# EAGLE board stencil (EAGLE 9.6.2), part 1 of 3
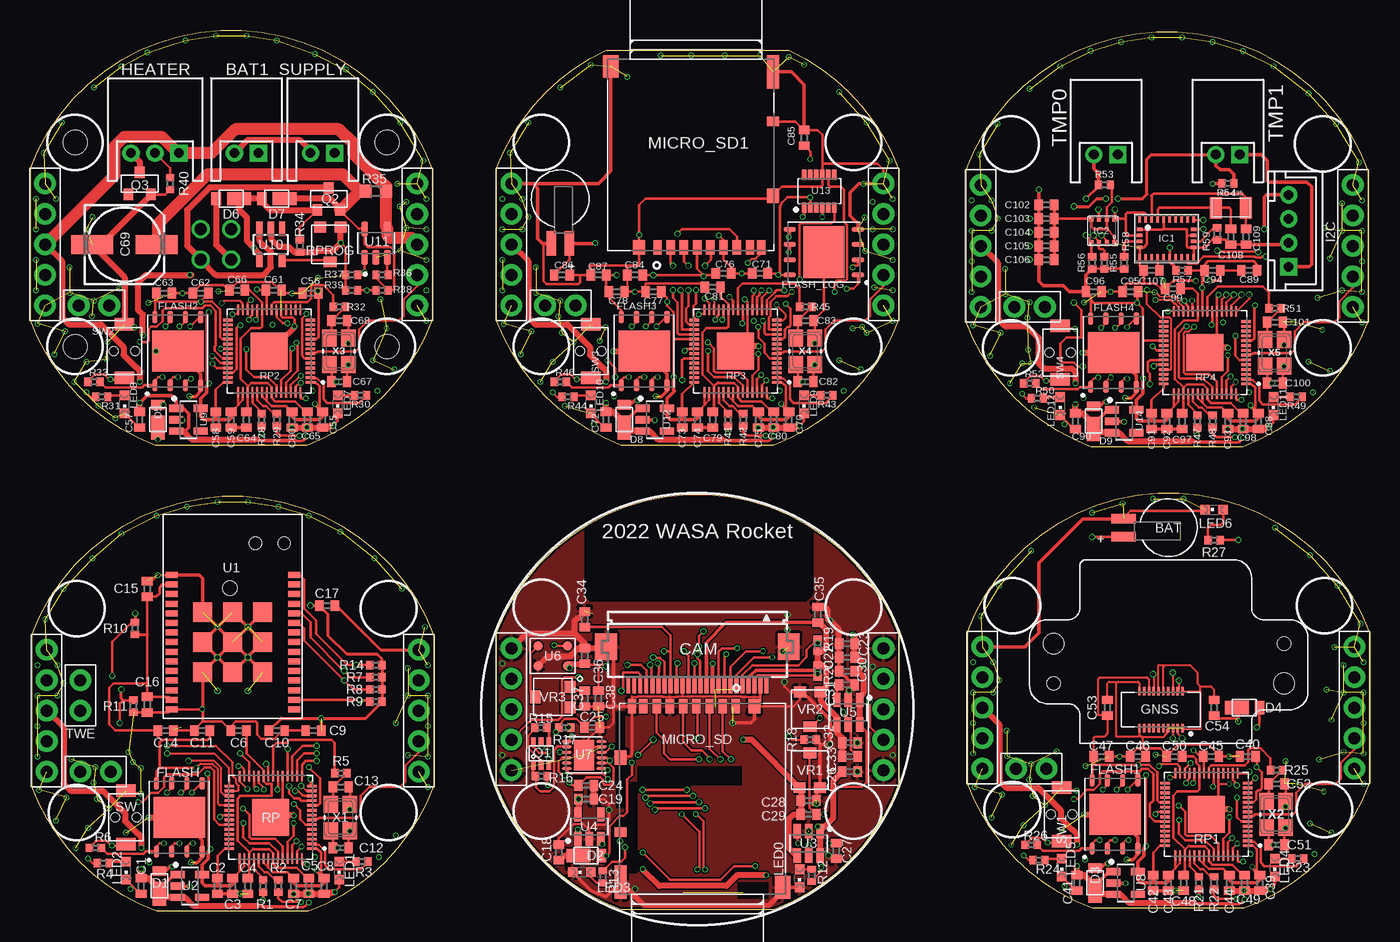
[diagram p0: board, top side]
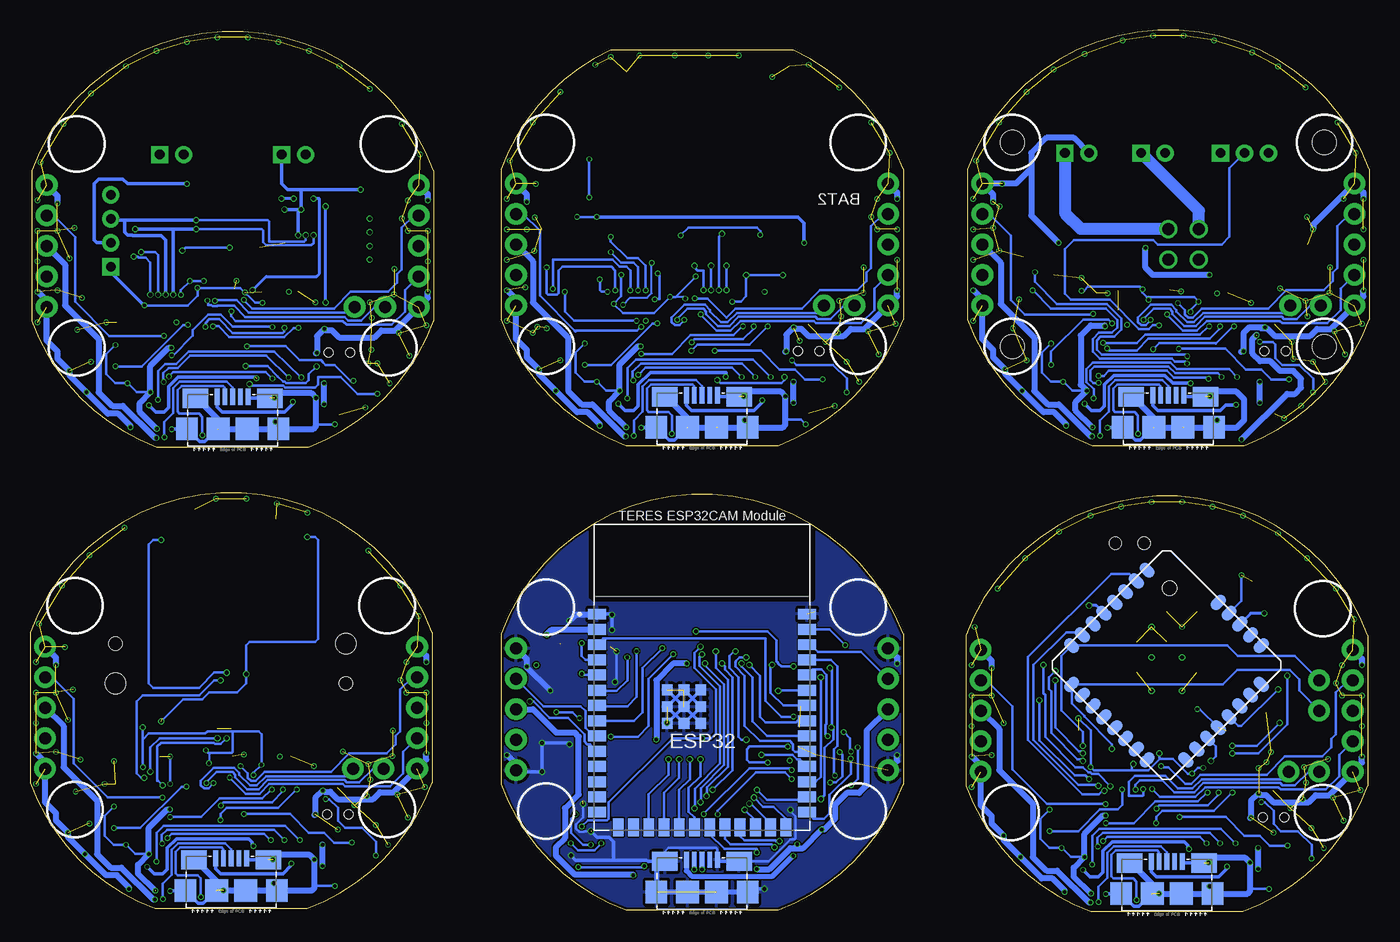
[diagram p1: board, bottom side, seen from below]

Size 111.63 x 73.48 mm. Coordinates in mm from the lower left corner, seen from the top.
Outline: 33.66,23.01 33.66,10.46 arc-49 23.24,0 10.54,0 arc-49 0.13,10.46 0.13,23.01 arc-139 33.66,23.01
Outline: 72.39,23.14 72.39,10.59 arc-49 61.98,0.13 49.28,0.13 arc-49 38.86,10.59 38.86,23.14 arc-139 72.39,23.14
Outline: 111.63,23.26 111.63,10.71 arc-49 101.22,0.25 88.52,0.25 arc-49 78.11,10.71 78.11,23.26 arc-139 111.63,23.26
Outline: 33.53,61.87 33.53,49.32 arc-49 23.11,38.86 10.41,38.86 arc-49 0,49.32 0,61.87 arc-139 33.53,61.87
Outline: 72.39,61.87 72.39,49.32 arc-49 61.98,38.86 49.28,38.86 arc-49 38.86,49.32 38.86,61.87 arc-44 48.01,71.79 63.25,71.79 arc-44 72.39,61.87
Outline: 111.51,61.75 111.51,49.2 arc-49 101.09,38.73 88.39,38.73 arc-49 77.98,49.2 77.98,61.75 arc-139 111.51,61.75
Copper layers (1*16): Top 0.035mm / dielectric 1mm / Bottom 0.035mm
Design rules "jlcpcb-2layers-1.0mm": minimum track width 5mil, minimum drill 0.3mm, track to track 5mil, track to pad 5mil, pad to pad 5mil, via to via 5mil, smd to smd 5mil, copper to edge 0.2mm, drill to drill 6mil, minimum pad ring 10mil, minimum via ring 3mil, stop-mask expansion 4mil, vias tented up to drill 1mm, thermal gap 10mil
Holes 2 mm at 29.76,64.1 29.76,47.1 3.76,64.1 3.76,47.1

## Footprints (pad centres in the part's own frame; a part is rotated, then mirrored left to right if it is on the bottom)
BAT_MS414GE-FL26E = smd 2.05 x 0.8: + 3.725,0.75; - 3.725,-0.75
S2B-PH-K-S = drill 0.8 square: 1 1,0 | drill 0.8: 2 -1,0
P5_2.54 = drill 1: 1 0,5.08; 2 0,2.54; 3 0,0; 4 0,-2.54; 5 0,-5.08
C0402 = smd 0.7 x 0.9: 1 -0.65,0; 2 0.65,0
153CLV-0605 = smd 3.5 x 1.6: + 2.7,0; - -2.7,0
FH12-24S-0.5SH = smd 0.3 x 1.3: 1 -5.75,3.25; 2 -5.25,3.25; 3 -4.75,3.25; 4 -4.25,3.25; 5 -3.75,3.25; 6 -3.25,3.25; 7 -2.75,3.25; 8 -2.25,3.25; 9 -1.75,3.25; 10 -1.25,3.25; 11 -0.75,3.25; 12 -0.25,3.25; 13 0.25,3.25; 14 0.75,3.25; 15 1.25,3.25; 16 1.75,3.25; 17 2.25,3.25; 18 2.75,3.25; 19 3.25,3.25; 20 3.75,3.25; 21 4.25,3.25; 22 4.75,3.25; 23 5.25,3.25; 24 5.75,3.25 | smd 1.8 x 2.2: PAD1 -7.62,0; PAD2 7.62,0
CUHS20S30 = smd 0.8 x 1.1: A 1.25,0 | smd 2 x 1.1: C -0.65,0
XCVR_ESP32-S3-WROOM-1-N16R2 = smd 1.5 x 0.9: 1 -8.75,5.26; 2 -8.75,3.99; 3 -8.75,2.72; 4 -8.75,1.45; 5 -8.75,0.18; 6 -8.75,-1.09; 7 -8.75,-2.36; 8 -8.75,-3.63; 9 -8.75,-4.9; 10 -8.75,-6.17; 11 -8.75,-7.44; 12 -8.75,-8.71; 13 -8.75,-9.98; 14 -8.75,-11.25; 27 8.75,-11.25; 28 8.75,-9.98; 29 8.75,-8.71; 30 8.75,-7.44; 31 8.75,-6.17; 32 8.75,-4.9; 33 8.75,-3.63; 34 8.75,-2.36; 35 8.75,-1.09; 36 8.75,0.18; 37 8.75,1.45; 38 8.75,2.72; 39 8.75,3.99; 40 8.75,5.26 | smd 0.9 x 1.5: 15 -6.985,-12.5; 16 -5.715,-12.5; 17 -4.445,-12.5; 18 -3.175,-12.5; 19 -1.905,-12.5; 20 -0.635,-12.5; 21 0.635,-12.5; 22 1.905,-12.5; 23 3.175,-12.5; 24 4.445,-12.5; 25 5.715,-12.5; 26 6.985,-12.5 | smd 0.9 x 0.9: 41_1 -1.5,-2.46; 41_2 -2.9,-2.46; 41_3 -0.1,-2.46; 41_4 -2.9,-3.86; 41_5 -1.5,-3.86; 41_6 -0.1,-3.86; 41_7 -2.9,-1.06; 41_8 -1.5,-1.06; 41_9 -0.1,-1.06
FC-135 = smd 1 x 1.8: P$1 0,0; P$2 2.5,0
SON127P600X500X80-9N = smd 1.04 x 0.44: 1 -2.845,1.905; 2 -2.845,0.635; 3 -2.845,-0.635; 4 -2.845,-1.905; 5 2.845,-1.905; 6 2.845,-0.635; 7 2.845,0.635; 8 2.845,1.905 | smd 3.4 x 4.3: 9 0,0
GYSFDMAXB = smd 0.2 x 0.7: 1 -0.55,6.54; 2 -0.55,3.46; 3 -0.15,6.54; 4 -0.15,3.46; 5 0.25,6.54; 6 0.25,3.46; 7 0.65,6.54; 8 0.65,3.46; 9 1.05,6.54; 10 1.05,3.46; 11 1.45,6.54; 12 1.45,3.46; 13 1.85,6.54; 14 1.85,3.46; 15 2.25,6.54; 16 2.25,3.46; 17 2.65,6.54; 18 2.65,3.46; 19 3.05,6.54; 20 3.05,3.46 | hole 1.1: 10.2,2.8; -9,-0.5 | hole 1.7: 10.2,-0.5; -9,2.8
S3B-PH-K-S = drill 0.8 square: 1 2,0 | drill 0.8: 2 0,0; 3 -2,0
B4B-PH-K-S = drill 0.8 square: 1 -3,0 | drill 0.8: 2 -1,0; 3 1,0; 4 3,0
LGA-28_3.80X5.20/0.5 = smd 0.3 x 0.5: 1 -2.25,1.56; 6 -2.25,-1.56; 7 -1.75,-1.56; 8 -1.25,-1.56; 9 -0.75,-1.56; 10 -0.25,-1.56; 11 0.25,-1.56; 12 0.75,-1.56; 13 1.25,-1.56; 14 1.75,-1.56; 15 2.25,-1.56; 20 2.25,1.56; 21 1.75,1.56; 22 1.25,1.56; 23 0.75,1.56; 24 0.25,1.56; 25 -0.25,1.56; 26 -0.75,1.56; 27 -1.25,1.56; 28 -1.75,1.56 | smd 0.5 x 0.3: 2 -2.25,0.75; 3 -2.25,0.25; 4 -2.25,-0.25; 5 -2.25,-0.75; 16 2.25,-0.75; 17 2.25,-0.25; 18 2.25,0.25; 19 2.25,0.75
BME280 = smd 0.35 x 0.5: 1 0.975,-1.025; 2 0.325,-1.025; 3 -0.325,-1.025; 4 -0.975,-1.025; 5 -0.975,1.025; 6 -0.325,1.025; 7 0.325,1.025; 8 0.975,1.025
GHI-CONNECTORS_10118192-0001LF(MICRO-USB-B-AMPHENOL-FCI) = smd 1.8 x 1.9: CGND1 -3.8,0; CGND4 3.8,0 | smd 1.9 x 1.9: CGND2 -1.2,0; CGND3 1.2,0 | smd 2.1 x 1.6: CGND5 3.1,2.55; CGND6 -3.1,2.55 | smd 0.4 x 1.35: D+ 0,2.675; D- -0.65,2.675; GND 1.3,2.675; ID 0.65,2.675; VBUS -1.3,2.675
CHIPLED_0603 = smd 0.8 x 0.8: A 0,-0.75; C 0,0.75
HRS_DM3AT-SF-PEJM5 = smd 0.7 x 1.2: 1 3.2,0; 2 2.1,0; 3 1,0; 4 -0.1,0; 5 -1.2,0; 6 -2.3,0; 7 -3.4,0; 8 -4.5,0; SWB -5.45,0 | smd 1 x 1.2: P1 -6.4,-4.3; P4 4.75,0 | smd 1 x 2.8: P2 -6.4,-14.65 | smd 1.3 x 1.9: P3 7.1,-15.1 | smd 1 x 0.8: SWA -6.4,-10.5
SOT-363 = smd 0.4 x 0.8: 1 -0.65,-0.95; 2 0,-0.95; 3 0.65,-0.95; 4 0.65,0.95; 5 0,0.95; 6 -0.65,0.95
SOT-23 = smd 0.802 x 0.972: P1 -0.95,-0.917; P2 0.95,-0.917; P3 0,0.917
R0402 = smd 0.6 x 0.7: 1 -0.5,0; 2 0.5,0
R0603 = smd 1 x 1.1: 1 -0.85,0; 2 0.85,0
QFN40P700X700X90-57N = smd 0.84 x 0.2: 1 -3.435,2.6; 2 -3.435,2.2; 3 -3.435,1.8; 4 -3.435,1.4; 5 -3.435,1; 6 -3.435,0.6; 7 -3.435,0.2; 8 -3.435,-0.2; 9 -3.435,-0.6; 10 -3.435,-1; 11 -3.435,-1.4; 12 -3.435,-1.8; 13 -3.435,-2.2; 14 -3.435,-2.6; 29 3.435,-2.6; 30 3.435,-2.2; 31 3.435,-1.8; 32 3.435,-1.4; 33 3.435,-1; 34 3.435,-0.6; 35 3.435,-0.2; 36 3.435,0.2; 37 3.435,0.6; 38 3.435,1; 39 3.435,1.4; 40 3.435,1.8; 41 3.435,2.2; 42 3.435,2.6 | smd 0.2 x 0.84: 15 -2.6,-3.435; 16 -2.2,-3.435; 17 -1.8,-3.435; 18 -1.4,-3.435; 19 -1,-3.435; 20 -0.6,-3.435; 21 -0.2,-3.435; 22 0.2,-3.435; 23 0.6,-3.435; 24 1,-3.435; 25 1.4,-3.435; 26 1.8,-3.435; 27 2.2,-3.435; 28 2.6,-3.435; 43 2.6,3.435; 44 2.2,3.435; 45 1.8,3.435; 46 1.4,3.435; 47 1,3.435; 48 0.6,3.435; 49 0.2,3.435; 50 -0.2,3.435; 51 -0.6,3.435; 52 -1,3.435; 53 -1.4,3.435; 54 -1.8,3.435; 55 -2.2,3.435; 56 -2.6,3.435 | smd 3.1 x 3.1: 57 0,0
PVZ3A = smd 1 x 0.9: 1 -0.85,-1.45; 3 0.85,-1.45 | smd 1.1 x 0.9: 2 0,1.45
TVAF06-A020B-R = smd 1.6 x 1.05: P$1 0,2.225; P$2 0,-2.225 | hole 0.75: -0.9,0; 0.9,0
P2_2.54 = drill 1: P$1 0,1.27; P$2 0,-1.27
ES920LR3 = smd 1 x 0.5: P1 -5.08,5.6; P2 -5.08,4.8; P3 -5.08,4; P4 -5.08,3.2; P5 -5.08,2.4; P6 -5.08,1.6; P7 -5.08,0.8; P8 -5.08,0; P9 -5.08,-0.8; P10 -5.08,-1.6; P11 -5.08,-2.4; P12 -5.08,-3.2; P13 -5.08,-4; P14 -5.08,-4.8; P15 -5.08,-5.6; P16 5.12,-5.6; P17 5.12,-4.8; P18 5.12,-4; P19 5.12,-3.2; P20 5.12,-2.4; P21 5.12,-1.6; P22 5.12,-0.8; P23 5.12,0; P24 5.12,0.8; P25 5.12,1.6; P26 5.12,2.4; P27 5.12,3.2; P28 5.12,4; P29 5.12,4.8; P30 5.12,5.6 | smd 1.6 x 1.6: P31 -2.5,2.5; P32 -2.5,0; P33 -2.5,-2.5; P34 0,2.5; P35 0,0; P36 0,-2.5; P37 2.5,2.5; P38 2.5,0; P39 2.5,-2.5 | hole 1: 1.9,8.25; 4.3,8.25
SOT95P240X110-5N = smd 1.18 x 0.609: 1 -1.024,0.95; 2 -1.024,0; 3 -1.024,-0.95; 4 1.024,-0.95; 5 1.024,0.95
SOT95P240X110-6N = smd 1.18 x 0.609: 1 -1.024,0.95; 2 -1.024,0; 3 -1.024,-0.95; 4 1.024,-0.95; 5 1.024,0; 6 1.024,0.95
SPU0414HR5H-SB = smd 0.8 x 0.8: 1 0.85,1.23; 2 0.85,-1.23; 3 -0.85,-1.23; 4 -0.85,1.23
SON45P300X300X80-13N = smd 0.85 x 0.25: 1 -1.45,1.125; 2 -1.45,0.675; 3 -1.45,0.225; 4 -1.45,-0.225; 5 -1.45,-0.675; 6 -1.45,-1.125; 7 1.45,-1.125; 8 1.45,-0.675; 9 1.45,-0.225; 10 1.45,0.225; 11 1.45,0.675; 12 1.45,1.125 | smd 1.65 x 2.55: 13 0,0
SOT23-5L = smd 0.533 x 1.2: 1 -0.95,-1.3; 2 0,-1.3; 3 0.95,-1.3 | smd 0.55 x 1.2: 4 0.95,1.3; 5 -0.95,1.3
SOT95P280X100-5N_LT6106CS5#PBF = smd 1.24 x 0.55: 1 -1.185,0.95; 2 -1.185,0; 3 -1.185,-0.95; 4 1.185,-0.95; 5 1.185,0.95
VSOJ12 = smd 0.862 x 0.372: 1 -1.375,1.25; 2 -1.375,0.75; 3 -1.375,0.25; 4 -1.375,-0.25; 5 -1.375,-0.75; 6 -1.375,-1.25; 7 1.375,-1.25; 8 1.375,-0.75; 9 1.375,-0.25; 10 1.375,0.25; 11 1.375,0.75; 12 1.375,1.25
LITE = smd 1.4 x 0.9: 1 0.25,11.43; 2 0.25,10.16; 3 0.25,8.89; 4 0.25,7.62; 5 0.25,6.35; 6 0.25,5.08; 7 0.25,3.81; 8 0.25,2.54; 17 13.72,2.54; 18 13.72,3.81; 19 13.72,5.08; 20 13.72,6.35; 21 13.72,7.62; 22 13.72,8.89; 23 13.72,10.16; 24 13.72,11.43 | smd 0.9 x 1.4: 9 2.54,0.25; 10 3.81,0.25; 11 5.08,0.25; 12 6.35,0.25; 13 7.62,0.25; 14 8.89,0.25; 15 10.16,0.25; 16 11.43,0.25; 25 11.43,13.72; 26 10.16,13.72; 27 8.89,13.72; 28 7.62,13.72; 29 6.35,13.72 | hole 1.2: 2.65,11.7
FA-238 = smd 1.4 x 1.2: 1 -1.1,-0.8; 2 1.1,-0.8; 3 1.1,0.8; 4 -1.1,0.8

## Placement (x,y rotation side)
BAT  MS414GE-FL26E  [BAT_MS414GE-FL26E]  94.87,31.98 180 top
BAT1  [S2B-PH-K-S]  18.03,63.22 0 top
BAT2  MS414GE-FL26E  [BAT_MS414GE-FL26E]  44.2,59.41 270 top
BOTTOM  P5_2.54  [P5_2.54]  32.39,16.74 0 top
BOTTOM1  P5_2.54  [P5_2.54]  110.37,16.99 0 top
BOTTOM2  P5_2.54  [P5_2.54]  32.26,55.6 0 top
BOTTOM3  P5_2.54  [P5_2.54]  71.13,55.6 0 top
BOTTOM4  P5_2.54  [P5_2.54]  110.24,55.47 0 top
C1  0.1µF  [C0402]  9.27,2.13 270 top
C2  10µF  [C0402]  15.62,2.13 270 top
C3  1µ  [C0402]  16.89,2.13 270 top
C4  1µ  [C0402]  18.16,2.13 270 top
C5  1μ  [C0402]  23.24,2.13 270 top
C6  1μ  [C0402]  17.4,15.08 180 top
C7  0.1µ  [C0402]  21.97,2.13 270 top
C8  0.1µ  [C0402]  24.51,2.13 270 top
C9  0.1µ  [C0402]  23.62,15.08 180 top
C10  0.1µ  [C0402]  20.57,15.08 0 top
C11  0.1µ  [C0402]  14.35,15.08 180 top
C12  0.1μ  [C0402]  25.91,5.31 180 top
C13  0.1μ  [C0402]  25.91,10.39 0 top
C14  0.1μ  [C0402]  11.3,15.08 0 top
C15  0.1µ  [C0402]  9.78,26.9 90 top
C16  0.1µ  [C0402]  9.78,17.24 90 top
C17  0.1µ  [C0402]  24.77,25.5 0 top
C18  0.1µF  [C0402]  44.07,4.92 90 top
C19  10µF  [C0402]  46.36,9.37 0 top
C20  P5_2.54  [P5_2.54]  40.13,16.86 0 top
C21  P5_2.54  [P5_2.54]  71.13,16.86 0 top
C22  22µF  [C0402]  68.07,21.18 180 top
C23  0.1µF  [C0402]  68.07,22.32 180 top
C24  0.1µF  [C0402]  46.36,10.51 0 top
C25  0.1µF  [C0402]  46.84,15.35 0 top
C26  0.1µF  [C0402]  68.33,11.66 0 top
C27  0.01µF  [C0402]  67.18,5.05 270 top
C28  2.2µF  [C0402]  64.89,9.24 0 top
C29  100pF  [C0402]  64.9,8.1 0 top
C30  0.1µF  [C0402]  68.07,20.04 180 top
C31  0.01µF  [C0402]  68.07,18.89 0 top
C32  1.0µF  [C0402]  68.33,14.07 0 top
C33  100pF  [C0402]  68.33,12.93 0 top
C34  15pF  [C0402]  46.23,24.36 90 top
C35  0.1µF  [C0402]  65.66,24.74 90 top
C36  0.1µF  [C0402]  46.23,21.31 90 top
C37  2.2µF  [C0402]  46.23,17.75 270 top
C38  10µF  [C0402]  47.37,17.75 270 top
C39  0.1µ  [C0402]  102.49,2.38 270 top
C40  0.1µ  [C0402]  101.47,12.93 180 top
C41  0.1µF  [C0402]  87.25,2.38 270 top
C42  10µF  [C0402]  93.6,2.38 270 top
C43  1µ  [C0402]  94.87,2.38 270 top
C44  0.1µ  [C0402]  99.95,2.38 270 top
C45  0.1µ  [C0402]  98.42,12.93 0 top
C46  0.1µ  [C0402]  92.33,12.93 180 top
C47  [C0402]  89.28,12.93 0 top
C48  1µ  [C0402]  96.14,2.38 270 top
C49  [C0402]  101.22,2.38 270 top
C50  [C0402]  95.38,12.93 180 top
C51  [C0402]  103.89,5.56 180 top
C52  [C0402]  103.89,10.64 0 top
C53  0.1µ  [C0402]  89.79,16.99 90 top
C54  0.1µ  [C0402]  98.68,16.99 90 top
C55  0.1µ  [C0402]  24.38,40.99 270 top
C56  0.1µ  [C0402]  23.37,51.53 180 top
C57  0.1µF  [C0402]  9.14,40.99 270 top
C58  10µF  [C0402]  15.49,40.99 270 top
C59  1µ  [C0402]  16.76,40.99 270 top
C60  0.1µ  [C0402]  21.84,40.99 270 top
C61  0.1µ  [C0402]  20.32,51.79 0 top
C62  0.1µ  [C0402]  14.22,51.53 180 top
C63  10µF  [C0402]  11.18,51.53 0 top
C64  1µ  [C0402]  18.03,40.99 270 top
C65  0.1µ  [C0402]  23.11,40.99 270 top
C66  0.1µ  [C0402]  17.27,51.79 180 top
C67  10p  [C0402]  25.78,44.17 180 top
C68  10p  [C0402]  25.78,49.25 0 top
C69  [153CLV-0605]  7.87,55.6 0 top
C70  0.1µ  [C0402]  63.25,40.99 270 top
C71  0.1µ  [C0402]  60.83,53.18 180 top
C72  0.1µF  [C0402]  48.01,40.99 270 top
C73  10µF  [C0402]  54.36,40.99 270 top
C74  1µ  [C0402]  55.63,40.99 270 top
C75  0.1µ  [C0402]  60.71,40.99 270 top
C76  0.1µ  [C0402]  57.78,53.18 0 top
C77  0.1µ  [C0402]  51.94,51.66 180 top
C78  [C0402]  48.89,51.66 0 top
C79  1µ  [C0402]  56.9,40.99 270 top
C80  [C0402]  61.98,40.99 270 top
C81  [C0402]  56.9,52.04 180 top
C82  [C0402]  64.64,44.17 180 top
C83  [C0402]  64.64,49.25 0 top
C84  10µF  [C0402]  50.42,53.06 180 top
C85  [C0402]  64.52,64.49 90 top
C86  0.1µF  [C0402]  44.32,53.06 0 top
C87  0.1µF  [C0402]  47.37,53.06 180 top
C88  0.1µ  [C0402]  102.36,40.87 270 top
C89  0.1µ  [C0402]  101.6,53.44 180 top
C90  0.1µF  [C0402]  87.12,40.87 270 top
C91  10µF  [C0402]  93.47,40.87 270 top
C92  1µ  [C0402]  94.74,40.87 270 top
C93  0.1µ  [C0402]  99.82,40.87 270 top
C94  0.1µ  [C0402]  98.55,53.44 0 top
C95  0.1µ  [C0402]  91.69,51.66 180 top
C96  [C0402]  88.65,51.66 0 top
C97  1µ  [C0402]  96.01,40.87 270 top
C98  [C0402]  101.09,40.87 270 top
C99  [C0402]  95.25,51.91 180 top
C100  [C0402]  103.76,44.04 180 top
C101  [C0402]  103.76,49.12 0 top
C102  0.1µ  [C0402]  84.71,58.9 0 top
C103  0.1µ  [C0402]  84.71,57.76 0 top
C104  0.1µ  [C0402]  84.71,56.61 0 top
C105  6.8n  [C0402]  84.71,55.47 0 top
C106  0.12u  [C0402]  84.71,54.33 0 top
C107  0.1µ  [C0402]  93.47,53.44 180 top
C108  [C0402]  100.08,56.23 90 top
C109  [C0402]  101.35,56.23 90 top
CAM  OV2640_FPC_INV  [FH12-24S-0.5SH]  55.63,22.07 180 top
D1  CUHS20S30  [CUHS20S30]  10.79,2.13 90 top
D2  CUHS20S30  [CUHS20S30]  46.36,4.67 0 top
D3  CUHS20S30  [CUHS20S30]  88.77,2.38 90 top
D4  CUHS20S30  [CUHS20S30]  101.22,16.99 0 top
D5  CUHS20S30  [CUHS20S30]  10.67,40.99 90 top
D6  CUHS20S30  [CUHS20S30]  16.76,59.41 180 top
D7  CUHS20S30  [CUHS20S30]  20.57,59.41 180 top
D8  CUHS20S30  [CUHS20S30]  49.53,40.99 90 top
D9  CUHS20S30  [CUHS20S30]  88.65,40.87 90 top
ESP32  ESP32-S3-WROOM-1-N16R2  [XCVR_ESP32-S3-WROOM-1-N16R2]  55.63,19.53 0 bottom
FC-135  FC-135  [FC-135]  98.84,58.65 0 top
FLASH  W25Q32JVZPIQ  [SON127P600X500X80-9N]  12.45,7.85 90 top
FLASH1  W25Q32JVZPIQ  [SON127P600X500X80-9N]  90.42,8.1 90 top
FLASH2  W25Q32JVZPIQ  [SON127P600X500X80-9N]  12.32,46.71 90 top
FLASH3  W25Q32JVZPIQ  [SON127P600X500X80-9N]  51.18,46.71 90 top
FLASH4  W25Q32JVZPIQ  [SON127P600X500X80-9N]  90.3,46.58 90 top
FLASH_LOG  W25Q32JVZPIQ  [SON127P600X500X80-9N]  66.17,54.96 180 top
GNSS  GYSFDMAXB  [GYSFDMAXB]  95.5,21.82 180 top
HEATER  [S3B-PH-K-S]  10.41,63.22 0 top
I2C  [B4B-PH-K-S]  104.9,56.74 90 top
IC1  BN055  [LGA-28_3.80X5.20/0.5]  94.73,56.11 0 top
IC2  BME280  [BME280]  89.41,56.74 0 top
J1  MICRO_USB_B_HIROSE_ZX62-B-5PA(11)MODEL  [GHI-CONNECTORS_10118192-0001LF(MICRO-USB-B-AMPHENOL-FCI)]  16.89,1.5 0 bottom
J2  MICRO_USB_B_HIROSE_ZX62-B-5PA(11)MODEL  [GHI-CONNECTORS_10118192-0001LF(MICRO-USB-B-AMPHENOL-FCI)]  55.63,1.62 0 bottom
J3  MICRO_USB_B_HIROSE_ZX62-B-5PA(11)MODEL  [GHI-CONNECTORS_10118192-0001LF(MICRO-USB-B-AMPHENOL-FCI)]  94.87,1.75 0 bottom
J4  MICRO_USB_B_HIROSE_ZX62-B-5PA(11)MODEL  [GHI-CONNECTORS_10118192-0001LF(MICRO-USB-B-AMPHENOL-FCI)]  16.76,40.36 0 bottom
J5  MICRO_USB_B_HIROSE_ZX62-B-5PA(11)MODEL  [GHI-CONNECTORS_10118192-0001LF(MICRO-USB-B-AMPHENOL-FCI)]  55.63,40.36 0 bottom
J6  MICRO_USB_B_HIROSE_ZX62-B-5PA(11)MODEL  [GHI-CONNECTORS_10118192-0001LF(MICRO-USB-B-AMPHENOL-FCI)]  94.74,40.23 0 bottom
LED0  [CHIPLED_0603]  64.14,2.77 180 top
LED1  [CHIPLED_0603]  25.78,3.4 180 top
LED2  [CHIPLED_0603]  8,3.4 180 top
LED3  [CHIPLED_0603]  45.97,3.27 90 top
LED4  [CHIPLED_0603]  103.76,3.65 180 top
LED5  [CHIPLED_0603]  85.98,3.65 180 top
LED6  [CHIPLED_0603]  98.68,33.5 90 top
LED7  [CHIPLED_0603]  25.65,42.26 180 top
LED8  [CHIPLED_0603]  7.87,42.26 180 top
LED9  [CHIPLED_0603]  64.52,42.26 180 top
LED10  [CHIPLED_0603]  46.74,42.26 180 top
LED11  [CHIPLED_0603]  103.63,42.14 180 top
LED12  [CHIPLED_0603]  85.85,42.14 180 top
MICRO_SD  DM3AT-SF-PEJM5  [HRS_DM3AT-SF-PEJM5]  55.63,17.12 0 top
MICRO_SD1  DM3AT-SF-PEJM5  [HRS_DM3AT-SF-PEJM5]  55.5,55.34 180 top
Q1  HN1C01FU  [SOT-363]  42.59,13.17 0 top
Q2  IRLML6402  [SOT-23]  24.89,59.41 0 top
Q3  IRLML6344  [SOT-23]  9.14,60.68 0 top
R1  27Ω  [R0402]  19.43,2.13 270 top
R2  27Ω  [R0402]  20.7,2.13 270 top
R3  1k  [R0402]  27.69,4.16 0 top
R4  1k  [R0402]  6.1,4.04 180 top
R5  1k  [R0402]  25.91,11.53 180 top
R6  1k  [R0402]  5.46,5.31 0 top
R7  10k  [R0402]  28.83,19.53 0 top
R8  10k  [R0402]  28.83,18.51 0 top
R9  10k  [R0402]  28.83,17.5 0 top
R10  10k  [R0402]  8.76,23.59 270 top
R11  10k  [R0402]  8.64,17.12 90 top
R12  [R0402]  65.15,3.02 270 top
R13  [R0402]  47.75,2.89 90 top
R14  10k  [R0402]  28.83,20.55 0 top
R15  10k  [R0402]  42.58,15.34 180 top
R16  10k  [R0402]  42.61,11.27 0 top
R17  10k  [R0402]  44.58,15.34 0 top
R18  1k  [R0402]  65.02,14.32 0 top
R19  10k  [R0402]  65.66,22.2 90 top
R20  10k  [R0402]  65.66,20.04 90 top
R21  [R0402]  97.41,2.38 270 top
R22  [R0402]  98.68,2.38 270 top
R23  [R0402]  105.66,4.42 0 top
R24  [R0402]  84.07,4.29 180 top
R25  1k  [R0402]  103.89,11.78 180 top
R26  1k  [R0402]  83.44,5.56 0 top
R27  100  [R0402]  98.68,30.96 0 top
R28  27.4  [R0402]  19.3,40.99 270 top
R29  27.4  [R0402]  20.57,40.99 270 top
R30  100  [R0402]  27.56,43.02 0 top
R31  220  [R0402]  5.97,42.9 180 top
R32  1k  [R0402]  25.78,50.39 180 top
R33  1k  [R0402]  5.33,44.17 0 top
R34  100k  [R0402]  22.48,55.47 90 top
R35  0.033  [R0603]  28.83,60.04 0 top
R36  100  [R0402]  29.34,53.06 180 top
R37  10k  [R0402]  26.8,53.06 0 top
R38  100k  [R0402]  29.34,51.79 0 top
R39  100k  [R0402]  26.8,51.79 0 top
R40  22k  [R0402]  11.68,60.68 90 top
R41  [R0402]  58.17,40.99 270 top
R42  [R0402]  59.44,40.99 270 top
R43  [R0402]  66.42,43.02 0 top
R44  [R0402]  44.83,42.9 180 top
R45  1k  [R0402]  64.64,50.39 180 top
R46  1k  [R0402]  44.2,44.17 0 top
R47  [R0402]  97.28,40.87 270 top
R48  [R0402]  98.55,40.87 270 top
R49  [R0402]  105.54,42.9 0 top
R50  [R0402]  83.95,42.77 180 top
R51  1k  [R0402]  103.76,50.26 180 top
R52  1k  [R0402]  83.31,44.04 0 top
R53  22k  [R0402]  89.53,60.55 180 top
R54  22k  [R0402]  99.82,60.68 0 top
R55  [R0402]  89.53,54.07 270 top
R56  [R0402]  88.52,54.07 270 top
R57  [R0402]  96.01,53.44 0 top
R58  [R0402]  91.19,54.07 270 top
R59  [R0402]  98.93,56.49 90 top
RP  RP2040  [QFN40P700X700X90-57N]  20.07,7.85 180 top
RP1  RP2040  [QFN40P700X700X90-57N]  98.04,8.1 180 top
RP2  RP2040  [QFN40P700X700X90-57N]  19.94,46.71 180 top
RP3  RP2040  [QFN40P700X700X90-57N]  58.8,46.71 180 top
RP4  RP2040  [QFN40P700X700X90-57N]  97.92,46.58 180 top
RPROG  10k  [PVZ3A]  25.02,55.6 180 top
SUPPLY  [S2B-PH-K-S]  24.38,63.22 0 top
SW  TVAF06-A020B-R  [TVAF06-A020B-R]  8,7.85 0 top
SW1  TVAF06-A020B-R  [TVAF06-A020B-R]  85.98,8.1 0 top
SW2  TVAF06-A020B-R  [TVAF06-A020B-R]  7.87,46.71 0 top
SW3  TVAF06-A020B-R  [TVAF06-A020B-R]  46.74,46.71 0 top
SW4  TVAF06-A020B-R  [TVAF06-A020B-R]  85.85,46.58 0 top
TMP0  [S2B-PH-K-S]  89.66,63.09 0 top
TMP1  [S2B-PH-K-S]  99.82,63.09 0 top
TOP  P5_2.54  [P5_2.54]  1.39,16.74 0 top
TOP1  P5_2.54  [P5_2.54]  79.37,16.99 0 top
TOP2  P5_2.54  [P5_2.54]  1.26,55.6 0 top
TOP3  P5_2.54  [P5_2.54]  40.13,55.6 0 top
TOP4  P5_2.54  [P5_2.54]  79.24,55.47 0 top
TWE  P2_2_2.54  [P2_2.54]  4.19,18.01 180 top
U1  ES920LR3  [ES920LR3]  16.89,22.45 0 top
U2  NJM12888F  [SOT95P240X110-5N]  13.34,2.13 0 top
U3  NJM11100  [SOT95P240X110-6N]  64.9,5.69 270 top
U4  NJM12888F  [SOT95P240X110-5N]  46.61,7.08 90 top
U5  NJM11100  [SOT95P240X110-6N]  68.2,16.61 270 top
U6  SPU0414HR5H-SB  [SPU0414HR5H-SB]  43.56,21.31 270 top
U7  FT234XD-R  [SON45P300X300X80-13N]  46.17,13.05 180 top
U8  NJM12888F  [SOT95P240X110-5N]  91.31,2.38 0 top
U9  NJM12888F  [SOT95P240X110-5N]  13.21,40.99 0 top
U10  MCP73831  [SOT23-5L]  20.07,55.6 180 top
U11  LT6106CS5#PBF  [SOT95P280X100-5N_LT6106CS5#PBF]  28.83,55.72 90 top
U12  NJM12888F  [SOT95P240X110-5N]  52.07,40.99 0 top
U13  RX-8035LC  [VSOJ12]  65.79,60.04 90 top
U14  NJM12888F  [SOT95P240X110-5N]  91.19,40.87 0 top
U$1  LITE  [LITE]  26.8,20.55 315 bottom
U$2  P2_2_2.54  [P2_2.54]  5.46,11.66 90 top
U$3  P2_2_2.54  [P2_2.54]  83.44,11.91 90 top
U$4  P2_2_2.54  [P2_2.54]  5.33,50.52 90 top
U$5  P2_2_2.54  [P2_2.54]  44.2,50.52 90 top
U$6  P2_2_2.54  [P2_2.54]  83.31,50.39 90 top
VR1  [PVZ3A]  65,11.78 0 top
VR2  [PVZ3A]  65.02,16.86 180 top
VR3  100k  [PVZ3A]  43.56,17.88 90 top
X1  FA-238  [FA-238]  25.87,7.84 270 top
X2  FA-238  [FA-238]  103.85,8.09 270 top
X3  FA-238  [FA-238]  25.74,46.7 270 top
X4  FA-238  [FA-238]  64.6,46.7 270 top
X5  FA-238  [FA-238]  103.72,46.57 270 top

## Library data of the parts
BAT BAT2 = MS414GE-FL26E; AVAILABILITY: In Stock; DESCRIPTION: Coin, 4.8mm 3 V Lithium Battery Rechargeable (Secondary) 2mAh; MF: Seiko; MP: MS414GE-FL26E; PACKAGE: Custom Package Seiko; PRICE: None; PURCHASE-URL: https://pricing.snapeda.com/search/part/MS414GE-FL26E/?ref=eda
BAT1 HEATER I2C SUPPLY TMP0 TMP1 = jst-ph
BOTTOM BOTTOM1-BOTTOM4 C20 C21 TOP TOP1-TOP4 TWE U$2-U$6 = pins
C1-C19 C22-C109 = rcl; SPICEPREFIX: C
CAM = camera
D1-D9 = diodes
ESP32 = ESP32-S3-WROOM-1-N16R2; AVAILABILITY: In Stock; DESCRIPTION: Bluetooth, WiFi 802.11b/g/n, Bluetooth v5.0 Transceiver Module 2.4GHz PCB Trace Surface Mount; MF: Espressif Systems; MP: ESP32-S3-WROOM-1-N16R2; PACKAGE: None; PRICE: None; PURCHASE-URL: https://pricing.snapeda.com/search/part/ESP32-S3-WROOM-1-N16R2/?ref=eda
FC-135 = tere
FLASH FLASH1-FLASH4 FLASH_LOG = W25Q32JVZPIQ; AVAILABILITY: In Stock; DESCRIPTION: FLASH - NOR Memory IC 32Mb (4M x 8) SPI - Quad I/O 133 MHz 8-WSON (6x5); MF: Winbond; MP: W25Q32JVZPIQ; PACKAGE: WSON-8 Winbond; PRICE: None; PURCHASE-URL: https://pricing.snapeda.com/search/part/W25Q32JVZPIQ/?ref=eda
GNSS = gps
IC1 = BNO055; PART_NUMBER: BNO055
IC2 = bosch-bme280
J1-J6 = connector
LED0 LED1-LED12 = led
MICRO_SD MICRO_SD1 = dm3at-sf-pejm5; DESCRIPTION: DM3 RA SMT microSD memory card push/push; DIGI-KEY_PART_NUMBER: HR1964CT-ND; DIGI-KEY_PURCHASE_URL: https://www.digikey.jp/product-detail/en/hirose-electric-co-ltd/DM3AT-SF-PEJM5/HR1964CT-ND/2533566?utm_source=snapeda&utm_medium=aggregator&utm_campaign=symbol; MF: Hirose; MP: DM3AT-SF-PEJM5; PACKAGE: None
Q1 = transistors
Q2 Q3 = mosfet
R1-R59 = rcl; SPICEPREFIX: R
RP RP1-RP4 = RP2040; AVAILABILITY: In Stock; DESCRIPTION: RP2040 chip for Raspberry Pi Pico - ARM® Cortex®-M0+ MCU 32-Bit; MF: Raspberry Pi; MP: RP2040; PACKAGE: None; PRICE: None; PURCHASE-URL: https://pricing.snapeda.com/search/part/RP2040/?ref=eda
RPROG VR1-VR3 = potentiometers
SW SW1-SW4 = switches
U1 = lora
U2-U5 U8 U9 U12 U14 = regulators
U6 = microphones
U7 = FT234XD-R; DESCRIPTION: USB Full Speed to Basic UART IC with USB Charger Detection; DIGI-KEY_PART_NUMBER: 768-1178-1-ND; DIGI-KEY_PURCHASE_URL: https://www.digikey.jp/product-detail/en/ftdi-future-technology-devices-international-ltd/FT234XD-R/768-1178-1-ND/3904926?utm_source=snapeda&utm_medium=aggregator&utm_campaign=symbol; MF: FTDI,; MP: FT234XD-R; PACKAGE: DFN-12 FTDI
U10 = mcp73831
U11 = LT6106CS5_PBF; AVAILABILITY: Not in stock; DESCRIPTION: LT6106 - Low Cost, 36V High Side Current Sense Amplifier; MF: Linear Technology; MP: LT6106CS5#PBF; PACKAGE: TSOT-23 Linear Technology; PRICE: None
U13 = rtc
U$1 = TWELite
X1-X5 = crystal'

## Nets
1.3V: C28.1 C29.1 CAM.10 U3.4 VR1.1
1V1: C48.1 C49.1 C50.1 RP1.23 RP1.45 RP1.50
1V2: C4.1 C5.1 C6.1 RP.23 RP.45 RP.50
1V3: C64.1 C65.1 C66.1 RP2.23 RP2.45 RP2.50
1V4: C79.1 C80.1 C81.1 RP3.23 RP3.45 RP3.50
1V5: C97.1 C98.1 C99.1 RP4.23 RP4.45 RP4.50
2.8V: C32.1 C33.1 C35.1 CAM.4 CAM.11 R19.1 R20.2 U5.4 VR2.1
ADC0: RP1.38
ADC1: RP1.39
ADC2: RP1.40
ADC3: RP1.41
ADC4: RP2.41
ADC5: RP3.38
ADC6: RP3.39
ADC7: RP3.40
ADC8: RP3.41
ADC9: RP4.40
ADC10: RP4.41
BOOT_LOAD: IC1.4 R58.1
CAM_RESET: CAM.6 ESP32.6
CHARGE: U10.1
D0: CAM.19 ESP32.32
D1: CAM.21 ESP32.34
D2: CAM.22 ESP32.35
D3: CAM.20 ESP32.33
D4: CAM.18 ESP32.31
D5: CAM.16 ESP32.28
D6: CAM.14 ESP32.26
D7: CAM.12 ESP32.24
DTR: Q1.4 R15.1
EN: C25.1 ESP32.3 Q1.6 R17.1
GND: BOTTOM.1 BOTTOM.5 C1.2 C2.2 C3.2 C4.2 C5.2 C6.2 C7.2 C8.2 C9.2 C10.2 C11.2 C12.2 C13.2 C14.2 C15.2 C16.1 C17.2 FLASH.4 FLASH.9 J1.CGND1 J1.CGND2 J1.CGND3 J1.CGND4 J1.CGND5 J1.CGND6 J1.GND LED1.C LED2.C R11.1 RP.19 RP.57 SW.P$1 TOP.1 TOP.5 U1.P1 U1.P15 U1.P31 U1.P32 U1.P33 U1.P34 U1.P35 U1.P36 U1.P37 U1.P38 U1.P39 U2.2 U$1.20 U$1.28 X1.2 X1.4
GND1: C18.2 C19.2 C20.1 C20.5 C21.1 C21.5 C22.2 C23.2 C24.2 C25.2 C26.2 C27.2 C28.2 C30.2 C31.2 C32.2 C34.2 C35.2 C36.2 C37.2 C38.2 CAM.2 CAM.15 CAM.PAD1 CAM.PAD2 ESP32.1 ESP32.40 ESP32.41_1 ESP32.41_2 ESP32.41_3 ESP32.41_4 ESP32.41_5 ESP32.41_6 ESP32.41_7 ESP32.41_8 ESP32.41_9 J2.CGND1 J2.CGND2 J2.CGND3 J2.CGND4 J2.CGND5 J2.CGND6 J2.GND LED0.C LED3.C MICRO_SD.6 MICRO_SD.P1 MICRO_SD.P2 MICRO_SD.P3 MICRO_SD.P4 MICRO_SD.SWB R18.2 U3.2 U4.2 U5.2 U6.2 U7.5 U7.13 VR1.3 VR2.3
GND2: BAT.- BOTTOM1.1 BOTTOM1.5 C39.2 C40.2 C41.2 C42.2 C43.2 C44.2 C45.2 C46.2 C47.2 C48.2 C49.2 C50.2 C51.2 C52.2 C53.2 C54.2 FLASH1.4 FLASH1.9 GNSS.1 GNSS.2 GNSS.7 GNSS.10 GNSS.12 GNSS.19 GNSS.20 J3.CGND1 J3.CGND2 J3.CGND3 J3.CGND4 J3.CGND5 J3.CGND6 J3.GND LED4.C LED5.C LED6.C RP1.19 RP1.57 SW1.P$1 TOP1.1 TOP1.5 U8.2 X2.2 X2.4
GND3: BAT1.2 BOTTOM2.1 BOTTOM2.5 C55.2 C56.2 C57.2 C58.2 C59.2 C60.2 C61.2 C62.2 C63.2 C64.2 C65.2 C66.2 C67.2 C68.2 C69.- FLASH2.4 FLASH2.9 J4.CGND1 J4.CGND2 J4.CGND3 J4.CGND4 J4.CGND5 J4.CGND6 J4.GND LED7.C LED8.C Q3.P2 R34.1 R37.1 R39.1 R40.1 RP2.19 RP2.57 RPROG.1 SUPPLY.2 SW2.P$1 TOP2.1 TOP2.5 U9.2 U10.2 U11.2 X3.2 X3.4
GND4: BAT2.- BOTTOM3.1 BOTTOM3.5 C70.2 C71.2 C72.2 C73.2 C74.2 C75.2 C76.2 C77.2 C78.2 C79.2 C80.2 C81.2 C82.2 C83.2 C84.2 C85.2 C86.2 C87.2 FLASH3.4 FLASH3.9 FLASH_LOG.4 FLASH_LOG.9 J5.CGND1 J5.CGND2 J5.CGND3 J5.CGND4 J5.CGND5 J5.CGND6 J5.GND LED9.C LED10.C MICRO_SD1.6 MICRO_SD1.P1 MICRO_SD1.P2 MICRO_SD1.P3 MICRO_SD1.P4 MICRO_SD1.SWA RP3.19 RP3.57 SW3.P$1 TOP3.1 TOP3.5 U12.2 U13.9 X4.2 X4.4
GND5: BOTTOM4.1 BOTTOM4.5 C88.2 C89.2 C90.2 C91.2 C92.2 C93.2 C94.2 C95.2 C96.2 C97.2 C98.2 C99.2 C100.2 C101.2 C102.2 C103.2 C104.2 C105.2 C106.2 C107.2 C108.1 C109.1 FLASH4.4 FLASH4.9 I2C.2 IC1.2 IC1.5 IC1.6 IC1.15 IC1.16 IC1.18 IC1.25 IC2.1 IC2.5 IC2.7 J6.CGND1 J6.CGND2 J6.CGND3 J6.CGND4 J6.CGND5 J6.CGND6 J6.GND LED11.C LED12.C R53.1 R54.1 R59.1 RP4.19 RP4.57 SW4.P$1 TOP4.1 TOP4.5 U14.2 X5.2 X5.4
GPS_RESET: GNSS.4 RP1.14
GPS_RTX: GNSS.5 RP1.16
GPS_TRX: GNSS.3 RP1.15
HEATER: Q3.P1
HSYNC: CAM.9 ESP32.8
I2C0_SCL: RP3.12 U13.6
I2C0_SCL1: I2C.4 IC1.19 IC2.4 R56.1 RP4.18
I2C0_SDA: RP1.11
I2C0_SDA1: RP2.11
I2C0_SDA2: RP3.11 U13.8
I2C0_SDA3: I2C.3 IC1.20 IC2.3 R55.1 RP4.17
I2C1_SCL: RP1.9
I2C1_SCL1: RP2.9
I2C1_SCL2: RP3.9
I2C1_SDA: RP1.8
I2C1_SDA1: RP2.8
I2C1_SDA2: RP3.8
I2C_SCL: CAM.5 ESP32.4 R19.2
I2C_SCL1: RP1.12
I2C_SCL2: RP2.12
I2C_SDA: CAM.3 ESP32.5 R20.1
INT: IC1.14 RP4.15
IO0: ESP32.27 Q1.3
ISENSE: R37.2 RP2.38 U11.1
LED0: R3.2 RP.2
LED1: R4.2 RP.37
LED2: ESP32.21 R12.2
LED3: ESP32.22 R13.2
LED4: R23.2 RP1.2
LED5: R24.2 RP1.37
LED6: R30.2 RP2.2
LED7: R31.2 RP2.37
LED8: R43.2 RP3.2
LED9: R44.2 RP3.37
LED10: R49.2 RP4.2
LED11: R50.2 RP4.37
MIC: ESP32.39 U6.4
N$1: LED3.A R13.1
N$2: Q1.2 R15.2
N$3: Q1.5 R16.2
N$4: C27.1 U3.3
N$5: J1.ID
N$6: D1.A J1.VBUS
N$7: LED0.A R12.1
N$8: LED1.A R3.1
N$9: LED2.A R4.1
N$10: C29.2 U3.5 VR1.2
N$11: C13.1 R5.1 X1.1
N$12: C31.1 U5.3
N$13: C33.2 U5.5 VR2.2
N$14: CAM.8 R18.1
N$15: U6.3 VR3.2
N$16: C37.1 VR3.3
N$17: C24.1 U7.2 U7.3 U7.9
N$18: J3.ID
N$19: D3.A J3.VBUS
N$20: LED4.A R23.1
N$21: LED5.A R24.1
N$22: C52.1 R25.1 X2.1
N$23: BAT.+ C54.1 D4.C GNSS.14
N$24: LED6.A R27.1
N$25: GNSS.6 R27.2
N$26: J4.ID
N$27: D5.A J4.VBUS
N$28: LED7.A R30.1
N$29: LED8.A R31.1
N$30: C68.1 R32.1 X3.1
N$32: RPROG.2 U10.5
N$33: R36.1 U11.3
N$34: HEATER.3 Q3.P3
N$35: J5.ID
N$36: D8.A J5.VBUS
N$37: LED9.A R43.1
N$38: LED10.A R44.1
N$39: C83.1 R45.1 X4.1
N$41: BAT2.+ C86.1 U13.1 U13.4
N$42: J6.ID
N$43: D9.A J6.VBUS
N$44: LED11.A R49.1
N$45: LED12.A R50.1
N$46: C101.1 R51.1 X5.1
N$48: C107.1 IC1.9
N$49: IC1.17 R59.2
N$50: C109.2 FC-135.P$2 IC1.27
N$51: C108.2 FC-135.P$1 IC1.26
PCLK: C34.1 CAM.17 ESP32.30
PWM0_B: RP1.3
PWM0_B1: RP2.3
PWM0_B2: RP3.3
PWM0_B3: RP4.3
PWM1_A: RP1.4
PWM1_A1: RP2.4
PWM1_A2: RP3.4
PWM1_A3: RP4.4
PWM1_B: RP1.5
PWM1_B1: RP2.5
PWM1_B2: RP3.5
PWM1_B3: RP4.5
PWM3_A: RP1.34
PWM3_A1: RP2.34
PWM3_A2: RP3.34
PWM3_A3: RP4.34
PWM4_A: RP1.36
PWM4_A1: RP2.36
PWM4_A2: RP3.36
PWM4_A3: RP4.36
PWM5_A: RP2.13
PWM5_A1: RP3.13
PWM5_A2: RP4.13
PWM5_B: RP2.14
PWM5_B1: RP4.14
QSPI_SCLK: FLASH.6 RP.52
QSPI_SCLK1: FLASH1.6 RP1.52
QSPI_SCLK2: FLASH2.6 RP2.52
QSPI_SCLK3: FLASH3.6 RP3.52
QSPI_SCLK4: FLASH4.6 RP4.52
QSPI_SD0: FLASH.5 RP.53
QSPI_SD1: FLASH.2 RP.55
QSPI_SD2: FLASH.3 RP.54
QSPI_SD3: FLASH.7 RP.51
QSPI_SD4: FLASH1.5 RP1.53
QSPI_SD5: FLASH1.2 RP1.55
QSPI_SD6: FLASH1.3 RP1.54
QSPI_SD7: FLASH1.7 RP1.51
QSPI_SD8: FLASH2.5 RP2.53
QSPI_SD9: FLASH2.2 RP2.55
QSPI_SD10: FLASH2.3 RP2.54
QSPI_SD11: FLASH2.7 RP2.51
QSPI_SD12: FLASH3.5 RP3.53
QSPI_SD13: FLASH3.2 RP3.55
QSPI_SD14: FLASH3.3 RP3.54
QSPI_SD15: FLASH3.7 RP3.51
QSPI_SD16: FLASH4.5 RP4.53
QSPI_SD17: FLASH4.2 RP4.55
QSPI_SD18: FLASH4.3 RP4.54
QSPI_SD19: FLASH4.7 RP4.51
QSPI_SS: FLASH.1 R6.2 RP.56
QSPI_SS1: FLASH1.1 R26.2 RP1.56
QSPI_SS2: FLASH2.1 R33.2 RP2.56
QSPI_SS3: FLASH3.1 R46.2 RP3.56
QSPI_SS4: FLASH4.1 R52.2 RP4.56
RESET: IC1.11 R57.1 RP4.16
ROLA_!RESET!: R14.1 RP.11 U1.P30
ROLA_RTX: R8.1 RP.16 U1.P25
ROLA_TRX: R7.1 RP.15 U1.P26
RTS: Q1.1 R16.1 U7.8
RTX: ESP32.36 U7.7
RX0: RP.28 TOP.4
RX1: BOTTOM.4 RP.7
RX2: C20.4 ESP32.29
RX3: C21.4 ESP32.10
RX4: RP1.28 TOP1.4
RX5: BOTTOM1.4 RP1.7
RX6: RP2.28 TOP2.4
RX7: BOTTOM2.4 RP2.7
RX8: RP3.28 TOP3.4
RX9: BOTTOM3.4 RP3.7
RX10: RP4.28 TOP4.4
RX11: BOTTOM4.4 RP4.7
SD: ESP32.23 MICRO_SD.SWA
SD1: MICRO_SD1.SWB RP3.14
SPI0_CS: ESP32.17 MICRO_SD.2
SPI0_CS1: RP1.32
SPI0_CS2: RP2.32
SPI0_CS3: MICRO_SD1.2 RP3.32
SPI0_CS4: RP4.32
SPI0_MISO: ESP32.20 MICRO_SD.7
SPI0_MISO1: RP1.31
SPI0_MISO2: RP2.31
SPI0_MISO3: MICRO_SD1.7 RP3.31
SPI0_MISO4: RP4.31
SPI0_MOSI: ESP32.18 MICRO_SD.3
SPI0_MOSI1: RP1.30
SPI0_MOSI2: RP2.30
SPI0_MOSI3: MICRO_SD1.3 RP3.30
SPI0_MOSI4: RP4.30
SPI0_SCK: ESP32.19 MICRO_SD.5
SPI0_SCK1: RP1.29
SPI0_SCK2: RP2.29
SPI0_SCK3: MICRO_SD1.5 RP3.29
SPI0_SCK4: RP4.29
SPI1_CS: RP2.16
SPI1_CS1: FLASH_LOG.1 RP3.16
SPI1_MISO: RP2.15
SPI1_MISO1: FLASH_LOG.2 RP3.15
SPI1_MOSI: RP1.18
SPI1_MOSI1: RP2.18
SPI1_MOSI2: FLASH_LOG.5 RP3.18
SPI1_SCK: RP1.17
SPI1_SCK1: RP2.17
SPI1_SCK2: FLASH_LOG.6 RP3.17
SW: R6.1 RP.35 SW.P$2
SW1: R26.1 RP1.35 SW1.P$2
SW2: R33.1 RP2.35 SW2.P$2
SW3: R46.1 RP3.35 SW3.P$2
SW4: R52.1 RP4.35 SW4.P$2
SWCLK: RP.24 U$2.P$1
SWCLK1: RP1.24 U$3.P$1
SWCLK2: RP2.24 U$4.P$1
SWCLK3: RP3.24 U$5.P$1
SWCLK4: RP4.24 U$6.P$1
SWD: RP.25 U$2.P$2
SWD1: RP1.25 U$3.P$2
SWD2: RP2.25 U$4.P$2
SWD3: RP3.25 U$5.P$2
SWD4: RP4.25 U$6.P$2
T0: R54.2 RP4.38 TMP1.2
T1: R53.2 RP4.39 TMP0.2
TEMP: HEATER.2 R40.2 RP2.40
TRX: ESP32.37 U7.10
TWE_BPS: RP.31 U$1.19
TWE_PGM: RP.12 U$1.2
TWE_RESET: R11.2 RP.30 U$1.21
TWE_RTS: RP.13 U$1.7
TWE_RTX: RP.17 TWE.P$2 U$1.8
TWE_SLEEP: R10.1 RP.29 U$1.27
TWE_TRX: RP.18 TWE.P$1 U$1.9
TX0: RP.27 TOP.2
TX1: BOTTOM.2 RP.6
TX2: C20.2 ESP32.38
TX3: C21.2 ESP32.9
TX4: RP1.27 TOP1.2
TX5: BOTTOM1.2 RP1.6
TX6: RP2.27 TOP2.2
TX7: BOTTOM2.2 RP2.6
TX8: RP3.27 TOP3.2
TX9: BOTTOM3.2 RP3.6
TX10: RP4.27 TOP4.2
TX11: BOTTOM4.2 RP4.6
USB_DM: J1.D- R1.2
USB_DM1: J2.D- U7.1
USB_DM2: J3.D- R21.2
USB_DM3: J4.D- R28.2
USB_DM4: J5.D- R41.2
USB_DM5: J6.D- R47.2
USB_DM_1: R1.1 RP.46
USB_DM_2: R21.1 RP1.46
USB_DM_3: R28.1 RP2.46
USB_DM_4: R41.1 RP3.46
USB_DM_5: R47.1 RP4.46
USB_DP: J1.D+ R2.2
USB_DP1: J2.D+ U7.12
USB_DP2: J3.D+ R22.2
USB_DP3: J4.D+ R29.2
USB_DP4: J5.D+ R42.2
USB_DP5: J6.D+ R48.2
USB_DP_1: R2.1 RP.47
USB_DP_2: R22.1 RP1.47
USB_DP_3: R29.1 RP2.47
USB_DP_4: R42.1 RP3.47
USB_DP_5: R48.1 RP4.47
USB_VCC: D2.A J2.VBUS U7.4
V: C69.+ D7.C Q2.P2 R35.1 R36.2 R38.2 U11.5
V+: BOTTOM.3 C1.1 D1.C TOP.3 U2.1 U2.3
V+1: C18.1 C20.3 C21.3 D2.C U4.1 U4.3
V+2: BOTTOM1.3 C41.1 D3.C TOP1.3 U8.1 U8.3
V+3: BOTTOM2.3 C57.1 HEATER.1 R35.2 TOP2.3 U9.1 U9.3 U11.4
V+4: BOTTOM3.3 C72.1 D8.C TOP3.3 U12.1 U12.3
V+5: BOTTOM4.3 C90.1 D9.C TOP4.3 U14.1 U14.3
VBAT: Q2.P3 U10.3
VBAT_IN: BAT1.1
VDD: C2.1 C3.1 C7.1 C8.1 C9.1 C10.1 C11.1 C14.1 C15.1 C16.2 C17.1 FLASH.8 R7.2 R8.2 R9.2 R10.2 R14.2 RP.1 RP.10 RP.22 RP.26 RP.33 RP.42 RP.43 RP.44 RP.48 RP.49 U1.P2 U1.P14 U2.5 U$1.5
VDD1: C19.1 C22.1 C23.1 C26.1 C30.1 C36.1 C38.1 ESP32.2 MICRO_SD.4 R17.2 U3.1 U3.6 U4.5 U5.1 U5.6 U6.1
VDD2: C39.1 C40.1 C42.1 C43.1 C44.1 C45.1 C46.1 C47.1 C53.1 D4.A FLASH1.8 GNSS.16 RP1.1 RP1.10 RP1.22 RP1.26 RP1.33 RP1.42 RP1.43 RP1.44 RP1.48 RP1.49 U8.5
VDD3: C55.1 C56.1 C58.1 C59.1 C60.1 C61.1 C62.1 C63.1 FLASH2.8 RP2.1 RP2.10 RP2.22 RP2.26 RP2.33 RP2.42 RP2.43 RP2.44 RP2.48 RP2.49 U9.5
VDD4: C70.1 C71.1 C73.1 C74.1 C75.1 C76.1 C77.1 C78.1 C84.1 C85.1 C87.1 FLASH3.8 FLASH_LOG.8 MICRO_SD1.4 RP3.1 RP3.10 RP3.22 RP3.26 RP3.33 RP3.42 RP3.43 RP3.44 RP3.48 RP3.49 U12.5 U13.2
VDD5: C88.1 C89.1 C91.1 C92.1 C93.1 C94.1 C95.1 C96.1 C102.1 C103.1 C104.1 C105.1 C106.1 FLASH4.8 I2C.1 IC1.3 IC1.28 IC2.2 IC2.6 IC2.8 R55.2 R56.2 R57.2 R58.2 RP4.1 RP4.10 RP4.22 RP4.26 RP4.33 RP4.42 RP4.43 RP4.44 RP4.48 RP4.49 TMP0.1 TMP1.1 U14.5
VPP: D5.C D6.C D7.A Q2.P1 R34.2 U10.4
VSENSE: R38.1 R39.2 RP2.39
VSUP: D6.A
VSUP_IN: SUPPLY.1
VSYNC: CAM.7 ESP32.7
WKUP: R9.1 RP.14 U1.P17
XCLK: CAM.13 ESP32.25
XIN1: C12.1 RP.20 X1.3
XIN2: C51.1 RP1.20 X2.3
XIN3: C67.1 RP2.20 X3.3
XIN4: C82.1 RP3.20 X4.3
XIN5: C100.1 RP4.20 X5.3
XOUT1: R5.2 RP.21
XOUT2: R25.2 RP1.21
XOUT3: R32.2 RP2.21
XOUT4: R45.2 RP3.21
XOUT5: R51.2 RP4.21

## Tracks (layer width: path | path; a pad name or v marks a point on that pad's centre or on a via)
1.3V  (via drill 0.3)
  Top 0.305: CAM.10 56.88,20.65 v56.9,20.67
  Top 0.508: U3.4 63.87,4.66 63.26,5.27 63.26,7.72 63.64,8.1 C29.1 C28.1 64.24,10.23 VR1.1 60.15,14.32 v59.44,14.32
  Bottom 0.508: v56.9,20.67 58.04,20.67 59.44,19.28 v59.44,14.32
1V1
  Top 0.2: C48.1 96.24,3.14 RP1.45 96.24,5.16 96.27,5.18 | C49.1 101.08,3.03 100.2,3.91 98.55,3.91 98.24,4.22 RP1.50 98.24,5.11 97.92,5.43 96.65,5.43 96.58,5.5 96.27,5.18 | 96.27,5.18 95.28,6.16 95.28,9.65 95.64,10.01 97.29,10.01 97.44,10.17 RP1.23 97.44,12.14 97.2,12.38 97.2,12.67 96.95,12.93 C50.1
1V2
  Top 0.2: C4.1 18.27,2.89 RP.45 18.27,4.9 18.29,4.92 | C5.1 23.1,2.78 22.23,3.65 20.57,3.65 20.27,3.96 RP.50 20.27,4.85 19.94,5.18 18.67,5.18 18.61,5.24 18.29,4.92 | 18.29,4.92 17.3,5.91 17.3,9.4 17.53,9.63 19.3,9.63 | 19.47,9.63 19.3,9.63 | C6.1 18.05,13.17 19.47,11.75 RP.23 19.47,10.85 19.69,10.63 20.16,10.63 20.16,9.62 19.31,9.62 19.3,9.63
1V3
  Top 0.2: C64.1 18.14,41.75 RP2.45 18.14,43.76 18.16,43.79 | C65.1 22.97,41.64 22.1,42.52 20.45,42.52 20.14,42.82 RP2.50 20.14,43.71 19.81,44.04 18.54,44.04 18.48,44.1 18.16,43.79 | 18.16,43.79 17.56,44.39 17.56,47.76 18.42,48.62 19.18,48.62 19.34,48.77 RP2.23 19.34,50.74 18.29,51.79 C66.1
1V4
  Top 0.2: C79.1 57,41.75 RP3.45 57,43.76 57.02,43.79 | C80.1 61.83,41.64 60.96,42.52 59.31,42.52 59,42.82 RP3.50 59,43.71 58.67,44.04 57.4,44.04 57.34,44.1 57.02,43.79 | 57.02,43.79 56.04,44.77 56.04,48.26 56.39,48.62 58.04,48.62 58.2,48.77 RP3.23 58.2,50.61 57.55,51.27 C81.1
1V5
  Top 0.2: C97.1 96.12,41.62 RP4.45 96.12,43.64 96.14,43.66 | C98.1 100.95,41.52 100.08,42.39 98.42,42.39 98.12,42.7 RP4.50 98.12,43.59 97.79,43.91 96.39,43.91 96.14,43.66 | 96.14,43.66 95.41,44.39 95.41,48.49 96.17,49.25 97.32,49.25 RP4.23 97.32,51.5 96.9,51.91 C99.1
2.8V
  Top 0.2: 60.14,19.72 59.88,19.46 CAM.4
  Top 0.305: R20.2 65.24,20.12 60.5,20.12 60.13,19.75 60.11,19.75 59.88,19.51 CAM.4 | C35.1 58.02,24.09 56.38,22.44 CAM.11
  Top 0.508: C35.1 65.76,24.09 66.39,23.46 66.39,22.02 66.07,21.7 R19.1 R20.2 66.07,20.54 66.39,20.22 66.39,18.78 65.92,18.31 VR2.1 65.89,18.3 65.89,17.56 67.25,16.2 U5.4 67.25,14.91 67.68,14.48 C32.1 C33.1
BOOT_LOAD
  Top 0.2: R58.1 91.19,55.72 91.32,55.86 IC1.4
CAM_RESET  (via drill 0.3)
  Top 0.2: CAM.6 58.88,19.73 60.33,21.18 v61.85,21.18
  Bottom 0.2: v61.85,21.18 61.85,19.28 62.74,18.39 64.32,18.39 ESP32.6
D0  (via drill 0.35)
  Top 0.2: CAM.19 52.38,19.92 52.42,19.97 52.42,20.58 v52.32,20.67
  Bottom 0.2: v52.32,20.67 52.32,20.46 52.34,20.44 51.44,19.53 51.44,15.85 50.22,14.63 ESP32.32
D1  (via drill 0.35)
  Top 0.2: CAM.21 51.38,20.1 50.93,20.55 v49.78,20.55
  Bottom 0.2: v49.78,20.55 49.91,20.42 49.91,18.24 48.84,17.17 ESP32.34
D2  (via drill 0.35)
  Top 0.2: CAM.22 50.88,19.71 50.67,19.91 49.4,19.91 49.4,18.51 v49.28,18.39
  Bottom 0.2: ESP32.35 49.22,18.44 v49.28,18.39
D3  (via drill 0.35)
  Top 0.2: v51.69,20.55 51.82,20.42 51.82,18.88 CAM.20
  Bottom 0.2: v51.69,20.55 50.8,19.66 50.8,16.23 50.35,15.77 47.82,15.77 47.69,15.9 ESP32.33
D4  (via drill 0.35)
  Top 0.2: v51.94,21.18 51.97,21.15 52.52,21.15 52.88,20.8 CAM.18
  Bottom 0.2: v51.94,21.18 52.49,21.18 52.8,20.87 52.8,20.83 52.83,20.8 52.83,20.42 52.07,19.66 52.07,15.47 50.81,14.2 48.29,14.2 48.03,13.94 48.03,13.46 47.88,13.31 46.93,13.31 ESP32.31
D5  (via drill 0.35)
  Top 0.2: CAM.16 53.88,20.57 v53.97,20.67 | v51.05,10.13 v54.74,10.13
  Bottom 0.2: v53.97,20.67 53.72,20.42 53.72,20.16 53.09,19.53 53.09,11.78 v54.74,10.13 | ESP32.28 47.13,9.3 50.22,9.3 v51.05,10.13
D6  (via drill 0.35)
  Top 0.2: v54.48,21.69 54.86,21.31 54.86,18.83 CAM.14 | v55.25,9.62 51.44,9.62 v51.31,9.5
  Bottom 0.2: v54.48,21.69 54.45,21.66 54.45,20.29 53.47,19.31 53.47,12.08 55.22,10.33 55.22,9.65 v55.25,9.62 | v51.31,9.5 50.55,8.73 49.66,8.73 48.64,7.72 ESP32.26
D7  (via drill 0.35)
  Top 0.2: v55.63,21.43 55.63,21.09 55.85,20.87 55.85,18.85 CAM.12 | v56.26,8.61 52.2,8.61 v52.07,8.48
  Bottom 0.2: v55.63,21.43 55.85,21.21 55.85,20.47 54.12,18.75 54.12,12.35 56.23,10.24 56.23,8.64 v56.26,8.61 | v52.07,8.48 51.18,7.59 ESP32.24
DTR
  Top 0.2: Q1.4 43.24,15.17 R15.1
EN  (via drill 0.3)
  Top 0.2: Q1.6 41.94,13.71 42.44,13.22 43.22,13.22 v43.22,13.34 | v43.81,14.96 44.07,15.21 44.07,15.33 R17.1 44.08,15.56 44.56,16.04 45.56,16.04 46.19,15.42 C25.1 47.06,16.23 v48.01,16.23
  Bottom 0.2: v43.22,13.34 43.31,13.44 43.31,14.45 v43.81,14.96 | ESP32.3 63.87,22.76 50.36,22.76 50.36,17.56 49.02,16.23 v48.01,16.23
GND  (via drill 0.3, 0.35)  (55 unrouted)
  Top 0.127: 11.56,28.05 U1.P1
  Top 0.15: v10.67,28.05 11.56,28.05
  Top 0.2: 21.19,15.05 C10.2 | C10.2 21.34,15.08 | 16.75,15.22 C6.2 | RP.19 21.07,8.85 RP.57 | SW.P$1 8.23,9.84 v9.24,9.84 | LED2.C 8.52,2.14 | 8.52,2.14 9.17,1.48 C1.2 | LED1.C 25.78,2 v25.4,1.62 | X1.2 25.26,6.55 C12.2 v25.65,5.31 | C13.2 26.67,10.28 X1.4 v26.67,8.48 | v10.67,28.05 9.97,27.35 C15.2 | U1.P15 11.55,16.59 C16.1 9.76,16.62 R11.1 | C10.2 C9.2 | C10.2 21.05,15.08 20.37,14.41 19.26,14.41 18.92,14.75 18.92,15.72 18.8,15.85 17.14,15.85 16.75,15.45 C6.2 | C6.2 15.99,15.85 14.39,15.85 13.7,15.16 C11.2 C14.2 | v8.38,1.88 8.52,2.01 8.52,2.14
  Top 0.203: U1.P15 14.38,16.85 14.39,16.86
  Top 0.254: U1.P33 14.39,16.86 14.39,15.85 | BOTTOM.1 29.21,21.82 25.53,25.5 C17.2
  Top 0.305: FLASH.9 14.35,5.94 FLASH.4 14.35,4.51 13.91,4.08 v13.4,4.08 | v13.34,2.1 12.34,2.1 U2.2 | C7.2 v21.97,1.46 | C4.2 C3.2 C2.2 | U1.P33 v15.62,21.18 v18.16,23.72 U1.P37 | U1.P39 v18.16,21.18 U1.P31 14.39,27.74 14.09,28.05 U1.P1 | U1.P32 14.56,22.28 | 14.56,22.28 U1.P36 U1.P38 U1.P34 14.56,22.62 14.56,22.28
  Top 0.508: v9.87,7.85 FLASH.9 | C7.2 C5.2 C8.2 25.02,1.48 25.16,1.62 v25.4,1.62 | v21.99,8.01 20.23,8.01 RP.57
  Bottom 0.2: J1.CGND2 17.78,1.5 | v23.75,4.54 24.89,4.54 v25.65,5.31 26.67,5.31 27.43,6.07 27.43,7.72 v26.67,8.48 | U$1.20 14.13,16.86 v14.35,16.86 | v8.38,1.88 9.81,1.88 9.94,2
  Bottom 0.203: U$1.28 10.67,25.9 v10.67,28.04
  Bottom 0.305: J1.CGND4 13.34,1.74 v13.34,2.1 | J1.GND 15.47,4.05 J1.CGND5 | v21.97,1.46 20.72,1.46 J1.CGND1 20.68,1.5 19.62,0.44 19.2,0.44 18.15,1.5
  Bottom 0.508: J1.CGND6 19.88,4.05 18.09,2.26 J1.CGND2 18.15,1.5 | 17.78,1.5 J1.CGND3 J1.CGND4 10.16,1.5 9.94,1.72 9.94,2 v9.94,4.07 10.33,4.46 13.38,4.46 J1.CGND5 | 9.94,7.78 v9.87,7.85 9.87,9.21 v9.24,9.84 | v25.4,1.62 25.4,1.74 26.43,2.77 27.3,2.77 v29.08,4.54 30.48,5.94 v30.48,6.32 31.5,7.34 31.5,7.97 32.39,8.86 BOTTOM.5 32.39,12.17 v33.15,12.93 | v23.21,1.49 v23.21,1.5 23.24,1.5 24.64,2.9 24.64,3.65 v23.75,4.54 23.75,6.47 22.21,8.01 v21.99,8.01 | v9.24,9.84 9.24,9.81 9.21,9.78 | BOTTOM.1 31.5,20.92 v31.5,20.29 | TOP.1 0.63,21.06 v0.63,20.55 | v0.63,12.93 0.63,12.41 TOP.5 3.36,9.69 4.49,9.69 5.07,9.12 8.03,9.12 8.63,9.72 9.13,9.72 v9.24,9.84
  other vias: 33.15,10.39 33.15,20.55 32.89,23.72 30.99,26.9 28.7,29.44 25.88,31.66 23.24,32.99 20.7,33.75 18.16,34.13 15.62,34.13 13.08,33.75 10.54,32.99 7.63,31.51 2.79,26.9 1.27,24.36 0.63,18.01 0.63,15.47 0.76,10.13 2.16,7.59 3.81,5.31 4.83,6.96 33.15,15.47 33.15,18.01 31.5,18.01 30.48,15.72 31.5,13.05 17.53,1.5 8.01,6.56 6.6,8.61 2.79,19.02 3.05,9.5 3.44,12.71 5.59,9.37 9.24,11.94 2.29,20.55 2.29,18.01 8.58,12.45 8.22,13.29 5.46,12.04 5.3,10.75 15.62,23.72 5.21,29.44 15.62,18.39 18.16,18.39
GND1  (via drill 0.3, 0.35)  (16 unrouted)
  Top 0.152: 60.88,17.88 59.3,17.88 59.26,17.92 54.36,17.92 | 54.36,17.92 53.99,17.92 53.95,17.88 53.34,17.88 52.7,17.88 52.66,17.92 50.69,17.92 50.65,17.88 50.17,17.88 50.18,17.87 50.18,17.24 MICRO_SD.SWB | CAM.15 54.38,17.94 54.36,17.92 | C18.2 44.07,6.07 45.29,7.29 46.15,7.29 46.61,6.83
  Top 0.2: CAM.2 60.88,17.88 60.88,17.62 MICRO_SD.P4 63.63,17.12 64.17,17.66 64.17,18.26 | 64.17,18.26 VR2.3 | MICRO_SD.SWB 50.17,17.12 50.17,13.05 50.04,12.93 49.33,12.93 MICRO_SD.P1 | C38.2 47.39,17.12 46.24,17.12 C37.2 | 48.64,17.12 48.64,15.72 48.26,15.34 47.5,15.34 | 47.5,15.34 C25.2 | U7.5 46.52,13.72 46.48,13.69 46.17,14 46.17,14.01 47.5,15.34 | C19.2 47.88,9.37 48.26,8.99 v48.26,8.48 48.26,7.59 47.88,7.21 46.99,7.21 46.61,6.83 U4.2 | MICRO_SD.6 53.34,17.13 53.34,17.88 | v62.87,19.15 62.87,18.77 63.37,18.26 64.17,18.26
  Top 0.305: C31.2 68.62,18.89 67.51,20 67.45,20 C30.2 C22.2 | MICRO_SD.P4 60.38,16.02 60.07,15.72 v58.55,15.72 | CAM.PAD2 48.64,21.43 48.64,17.12 | C38.2 50.03,17.1 50.18,17.24 | LED3.C 46.76,1.74 48,1.24 MICRO_SD.P2 | v50.42,1.88 50.12,1.58 | MICRO_SD.P3 LED0.C | CAM.PAD1 63.12,22.2 v63.12,23.47 | C28.2 65.54,10.02 VR1.3 65.84,14 R18.2 65.91,13.94 v66.67,13.94 66.67,14.87 66.67,14.88 66.67,16.01 64.36,18.31 VR2.3 | v66.55,4.67 66.91,4.67 C27.2
  Top 0.406: MICRO_SD.P2 50.12,1.58 51.16,0.53 61.59,0.53 62.73,1.66 MICRO_SD.P3
  Top 0.508: C19.2 C24.2 | 67.41,22.34 67.41,23.53 66.7,24.23 v66.67,24.23 66.49,24.41 66.49,25.1 66.21,25.39 C35.2 | U5.2 68.2,18.36 v68.26,18.42 68.72,18.88 C31.2 | C36.2 45.69,21.96 45.02,21.28 43.16,21.28 U6.2 | C36.2 47.89,21.96 CAM.PAD2 | 45.4,23.2 45.4,24.21 45.62,24.44 45.66,24.44 C34.2 | C36.2 46.23,22.37 45.4,23.2 | C20.1 41.38,23.2 45.4,23.2 | C22.2 C23.2
  Bottom 0.2: J2.GND 54.33,5.15 54.48,5.31 58.42,5.31 58.9,4.83 58.9,4 | J2.CGND5 50.08,4.17 48.24,6.01 47.93,6.01 47.85,6.09 47.85,7.95 48.26,8.35 v48.26,8.48 | v62.74,21.69 62.74,19.28 v62.87,19.15 | v65.53,8.99 65.53,7.85 66.11,7.27 66.11,6.9 65.85,6.63 65.47,6.63 65.4,6.7 v64.9,6.7
  Bottom 0.305: J2.GND 54.2,4.17 J2.CGND5 | J2.CGND1 59.41,1.62 | ESP32.41_9 ESP32.41_4 | ESP32.41_7 ESP32.41_6 | v50.42,1.88 51.57,1.88 J2.CGND4 | ESP32.1 63.17,24.79 v63.12,24.74 v63.12,23.47 | v66.67,13.94 66.8,14.07 v68.96,14.07 v68.96,11.66 71,11.66 C21.5 | J2.CGND6 60.13,4.17 60.24,4.29 62.99,4.29 | v66.55,4.67 66.17,4.29 62.99,4.29 | v64.9,6.7 64.39,6.19 63.37,6.19 62.99,5.81 62.99,4.29 | ESP32.41_8 ESP32.41_3 ESP32.41_5 ESP32.41_2 ESP32.41_8
  Bottom 0.406: J2.CGND4 J2.CGND1 59.43,3.47 58.9,4 J2.CGND6
  Bottom 0.508: J2.CGND6 58.61,4.17 | J2.CGND2 56.89,1.62 | C21.1 70.23,21.05 v70.23,20.42 70.23,20.39 v68.26,18.42 | v71.88,13.05 71.13,12.3 C21.5 | C20.1 39.37,21.19 v39.37,20.67 | C20.5 39.37,12.54 v39.37,13.05 | ESP32.1 64.43,24.73 66.17,24.73 v66.67,24.23
  pour Bottom: 46.1,26.01 46.1,33.63 36.7,24.23 36.7,8.23 47.12,-2.19 64.52,-2.19 75.06,8.35 75.06,23.47 74.8,23.72 74.8,23.85 65.15,33.5 65.15,26.13 64.77,25.75 46.36,25.75
  pour Top: 46.1,33.25 46.1,26.26 46.61,25.75 64.77,25.75 65.41,26.39 65.41,33.25 66.29,34.13 76.96,23.47 76.96,9.5 66.17,-1.3 66.17,-1.68 43.56,-1.68 43.18,-2.06 43.18,0.86 35.56,8.48 35.56,28.55 40.13,33.12 45.97,33.12
GND2  (via drill 0.3)  (53 unrouted)
  Top 0.152: C53.2 89.79,19.02 89.92,19.15 90.68,19.15 | 90.68,19.15 92.33,19.15 92.45,19.02 GNSS.20 | 92.71,14.58 92.58,14.58 92.45,14.71 | GNSS.7 94.87,15.26 94.76,15.15 94.76,14.84 94.49,14.58 92.71,14.58 | 92.71,14.58 92.71,13.73 92.58,13.6 | GNSS.12 94.05,20.55 94.62,20.55 | 97.54,18.77 98.42,18.77 98.68,18.51 C54.2 | 97.54,18.77 97.28,19.02 97.28,19.91 96.65,20.55 94.62,20.55 | GNSS.19 92.45,14.71 | 92.45,14.71 92.33,14.58 90.55,14.58 90.55,19.02 90.68,19.15 | 97.54,18.39 97.54,15.21 96.12,15.21 GNSS.1 | 99.04,10.77 99.17,10.64 v99.95,10.64 | 97.54,18.39 97.51,18.36 GNSS.2 | 97.54,18.39 97.54,18.77 | 94.62,20.55 94.45,20.38 GNSS.10
  Top 0.2: 99.04,12.89 C45.2 99.19,12.93 | 99.19,12.93 C40.2 | C47.2 v90.81,12.93 C46.2 91.68,13 92.28,13.6 92.58,13.6 94.19,13.6 94.73,13.06 C50.2 95.72,13.92 98.2,13.92 99.19,12.93 | RP1.19 99.04,10.77 99.04,9.1 RP1.57 | SW1.P$1 86.21,10.09 v87.22,10.09 | LED5.C 86.49,2.39 | 86.49,2.39 87.15,1.73 C41.2 | LED4.C 103.76,2.26 v103.38,1.88 | X2.2 103.24,6.8 C51.2 v103.63,5.56 | C52.2 104.65,10.53 X2.4 v104.65,8.73 | LED6.C 97.8,33.37 91.69,33.37 91.14,32.82 BAT.- | v86.23,2.13 86.49,2.39
  Top 0.305: FLASH1.9 92.33,6.19 FLASH1.4 92.33,4.76 91.89,4.33 v91.38,4.33 | v91.31,2.35 90.32,2.35 U8.2 | C44.2 v99.95,1.72 | C48.2 C43.2 C42.2 | BAT.- 87.75,32.73 84.07,29.05 84.07,23.21 82.93,22.07 TOP1.1
  Top 0.508: v87.85,8.1 FLASH1.9 | C44.2 C49.2 C39.2 103,1.73 103.14,1.88 v103.38,1.88 | RP1.57 98.46,8.51 v99.97,8.51 v99.97,8.52
  Bottom 0.2: J3.CGND2 95.76,1.75 | v101.73,4.8 102.87,4.8 v103.63,5.56 104.65,5.56 105.41,6.32 105.41,7.97 v104.65,8.73 | v99.95,12.93 v99.95,10.64 | v86.23,2.13 87.79,2.13 87.92,2.26
  Bottom 0.305: J3.CGND4 91.31,1.99 v91.31,2.35 | J3.GND 93.44,4.3 J3.CGND5 | v99.95,1.72 98.7,1.72 J3.CGND1 98.66,1.75 97.6,0.7 97.18,0.7 96.13,1.75
  Bottom 0.508: J3.CGND6 97.86,4.3 96.07,2.51 J3.CGND2 96.13,1.75 | 95.76,1.75 J3.CGND3 J3.CGND4 88.14,1.75 87.92,1.97 87.92,2.26 v87.92,4.32 88.31,4.71 91.36,4.71 J3.CGND5 | 87.92,8.03 v87.85,8.1 87.85,9.47 v87.22,10.09 | v103.38,1.88 103.38,1.99 104.4,3.02 105.28,3.02 v107.06,4.8 108.46,6.19 v108.46,6.58 109.47,7.59 109.47,8.22 110.37,9.12 BOTTOM1.5 110.37,12.42 v111.12,13.18 | v101.19,1.75 101.21,1.75 102.62,3.16 102.62,3.91 v101.73,4.8 101.73,6.98 100.19,8.52 v99.97,8.52 | v87.22,10.09 87.22,10.06 87.19,10.03 | BOTTOM1.1 109.47,21.17 v109.47,20.55 | TOP1.1 78.61,21.31 v78.61,20.8 | v78.61,13.18 78.61,12.67 TOP1.5 81.34,9.94 82.47,9.94 83.05,9.37 86.01,9.37 86.61,9.98 87.11,9.98 v87.22,10.09
  other vias: 111.12,10.64 111.12,20.8 83.44,30.07 110.87,23.97 108.97,27.15 106.68,29.69 103.76,31.98 96.14,34.39 93.6,34.39 91.06,34.01 88.52,33.25 80.77,27.15 79.25,24.61 78.61,18.26 78.61,15.72 78.74,10.39 80.14,7.85 81.79,5.56 82.8,7.21 104.65,12.54 107.82,10 111.12,15.72 111.12,18.26 109.47,18.26 108.46,15.97 109.47,13.31 107.44,12.67 105.41,10.64 106.68,7.34 95.5,1.75 85.98,6.82 84.58,8.86 80.77,19.28 81.41,15.08 81.03,9.75 81.42,12.97 83.57,9.62 85.57,13.34 87.98,12.13 80.26,20.8 80.26,18.26 93.8,13.08 108.04,18.5 108.71,22.05 83.43,12.3 83.28,11
GND3  (via drill 0.3)  (56 unrouted)
  Top 0.2: 20.94,51.76 C61.2 20.83,51.79 | C56.2 21.08,51.53 20.83,51.79 | C63.2 v12.7,51.53 C62.2 13.57,51.61 14.18,52.21 16.08,52.21 16.5,51.79 C66.2 17.3,52.46 20.15,52.46 20.83,51.79 | 20.94,47.71 RP2.57 | SW2.P$1 8.11,48.69 v8.71,48.69 | LED8.C 9.04,40.34 C57.2 | LED7.C 25.65,40.87 v25.27,40.48 | X3.2 25.13,45.41 C67.2 v25.53,44.17 | C68.2 26.54,49.14 X3.4 v26.54,47.34 | R39.1 R37.1 26.3,55.35 25.92,55.72 v25.91,55.72 | R40.1 11.27,59.76 Q3.P2 | RP2.19 20.94,49.63 21.07,49.5 21.9,49.5 22.04,49.36 v22.04,48.79
  Top 0.305: FLASH2.9 14.22,44.8 FLASH2.4 14.22,43.37 13.79,42.94 v13.27,42.94 | v12.7,40.96 12.21,40.96 U9.2 | C60.2 v21.84,40.33 | C64.2 C59.2
  Top 0.508: v10.51,46.71 FLASH2.9 | C60.2 C65.2 C55.2 24.89,40.34 25.04,40.48 v25.27,40.48 | RP2.57 20.74,47.5 20.98,47.5 20.98,47.66 22.04,48.72 v22.04,48.79 | U10.2 20.11,56.85 20.11,56.01 20.72,55.41 21.55,55.41 21.99,54.97 R34.1 23.88,54.97 24,55.1 25.28,55.1 v25.91,55.72 25.87,55.76 RPROG.1 | BAT1.2 17.05,63.22 18.16,64.32 22.45,64.32 23.38,63.39 SUPPLY.2 | SW2.P$1 7.87,49.98 7.88,49.99 7.88,52.89 C69.- 5.93,55.6 Q3.P2
  Bottom 0.2: J4.CGND2 17.65,40.36 | v23.55,43.41 24.77,43.41 v25.53,44.17 26.54,44.17 27.3,44.93 27.3,46.58 v26.54,47.34
  Bottom 0.305: v12.7,40.96 12.7,40.62 J4.CGND4 | J4.GND 15.34,42.91 J4.CGND5 | v21.84,40.33 20.59,40.33 J4.CGND1 20.55,40.36 19.5,39.3 19.08,39.3 18.02,40.36
  Bottom 0.508: J4.CGND6 19.75,42.91 17.96,41.12 J4.CGND2 18.02,40.36 | 17.65,40.36 J4.CGND3 J4.CGND4 11.05,40.36 10.45,40.96 10.45,42.67 11.09,43.32 13.25,43.32 J4.CGND5 | 10.7,46.64 10.63,46.71 v10.51,46.71 10.51,48.2 10.02,48.69 v8.71,48.69 | v25.27,40.48 25.27,40.6 26.3,41.63 27.18,41.63 v28.96,43.41 30.35,44.8 v30.35,45.18 31.37,46.2 31.37,46.83 32.26,47.72 BOTTOM2.5 32.26,51.03 v33.02,51.79 | v23.08,40.36 v23.09,40.36 23.11,40.36 24.51,41.76 24.51,42.45 v23.55,43.41 24.06,43.91 24.06,48.01 23.22,48.84 22.09,48.84 v22.04,48.79 | v8.71,48.69 8.76,48.64 9.09,48.64 | v31.37,59.15 31.37,59.78 BOTTOM2.1 29.46,60.68 28.19,61.95 | v0.51,59.41 0.51,59.92 TOP2.1 4.7,57.24 v4.7,56.87 | v0.51,51.79 0.51,51.27 TOP2.5 3.23,48.55 4.37,48.55 4.94,47.98 7.9,47.98 8.51,48.58 8.6,48.58 v8.71,48.69 | SUPPLY.2 24.65,64.49 26.92,64.49 28.19,63.22 28.19,61.95 | 28.19,61.95 28.19,58.01 v25.91,55.72
  other vias: 33.02,49.25 33.02,59.41 5.33,68.68 32.77,62.58 30.86,65.76 28.57,68.3 26.32,70.17 23.75,71.47 20.57,72.62 18.03,73 15.49,73 12.95,72.62 9.78,71.6 7.62,70.43 2.67,65.76 1.14,63.22 0.51,56.87 0.51,54.33 0.63,48.99 2.03,46.45 3.68,44.17 4.7,45.82 7.11,41.12 29.72,48.61 33.02,54.33 33.02,56.87 31.37,56.99 30.86,55.09 29.21,51.03 28.57,45.95 21.84,51.53 24,52.8 5.71,42.14 6.35,46.06 6.48,47.47 5.21,57.88 3.3,53.69 2.92,48.36 3.31,51.57 7.46,51.95 9.87,50.74 2.16,59.41 15.69,51.69 30.82,58.76 30.6,60.66 5.33,50.9 5.17,49.61
GND4  (via drill 0.3)  (49 unrouted)
  Top 0.152: C84.2 49.77,51.88 C78.2